# Altium PCB Project2_ESP_LoRA.PcbDoc
Units mil, origin at the board's own origin, x right, y up, seen from the top; angles counter-clockwise.
Board outline 1968.5 x 1968.5 mil, 2 copper layers (Top Layer, Bottom Layer); 28 components, 29 nets, 146 pads, 53 vias.
Unrouted connection lines stored in the file: 1.
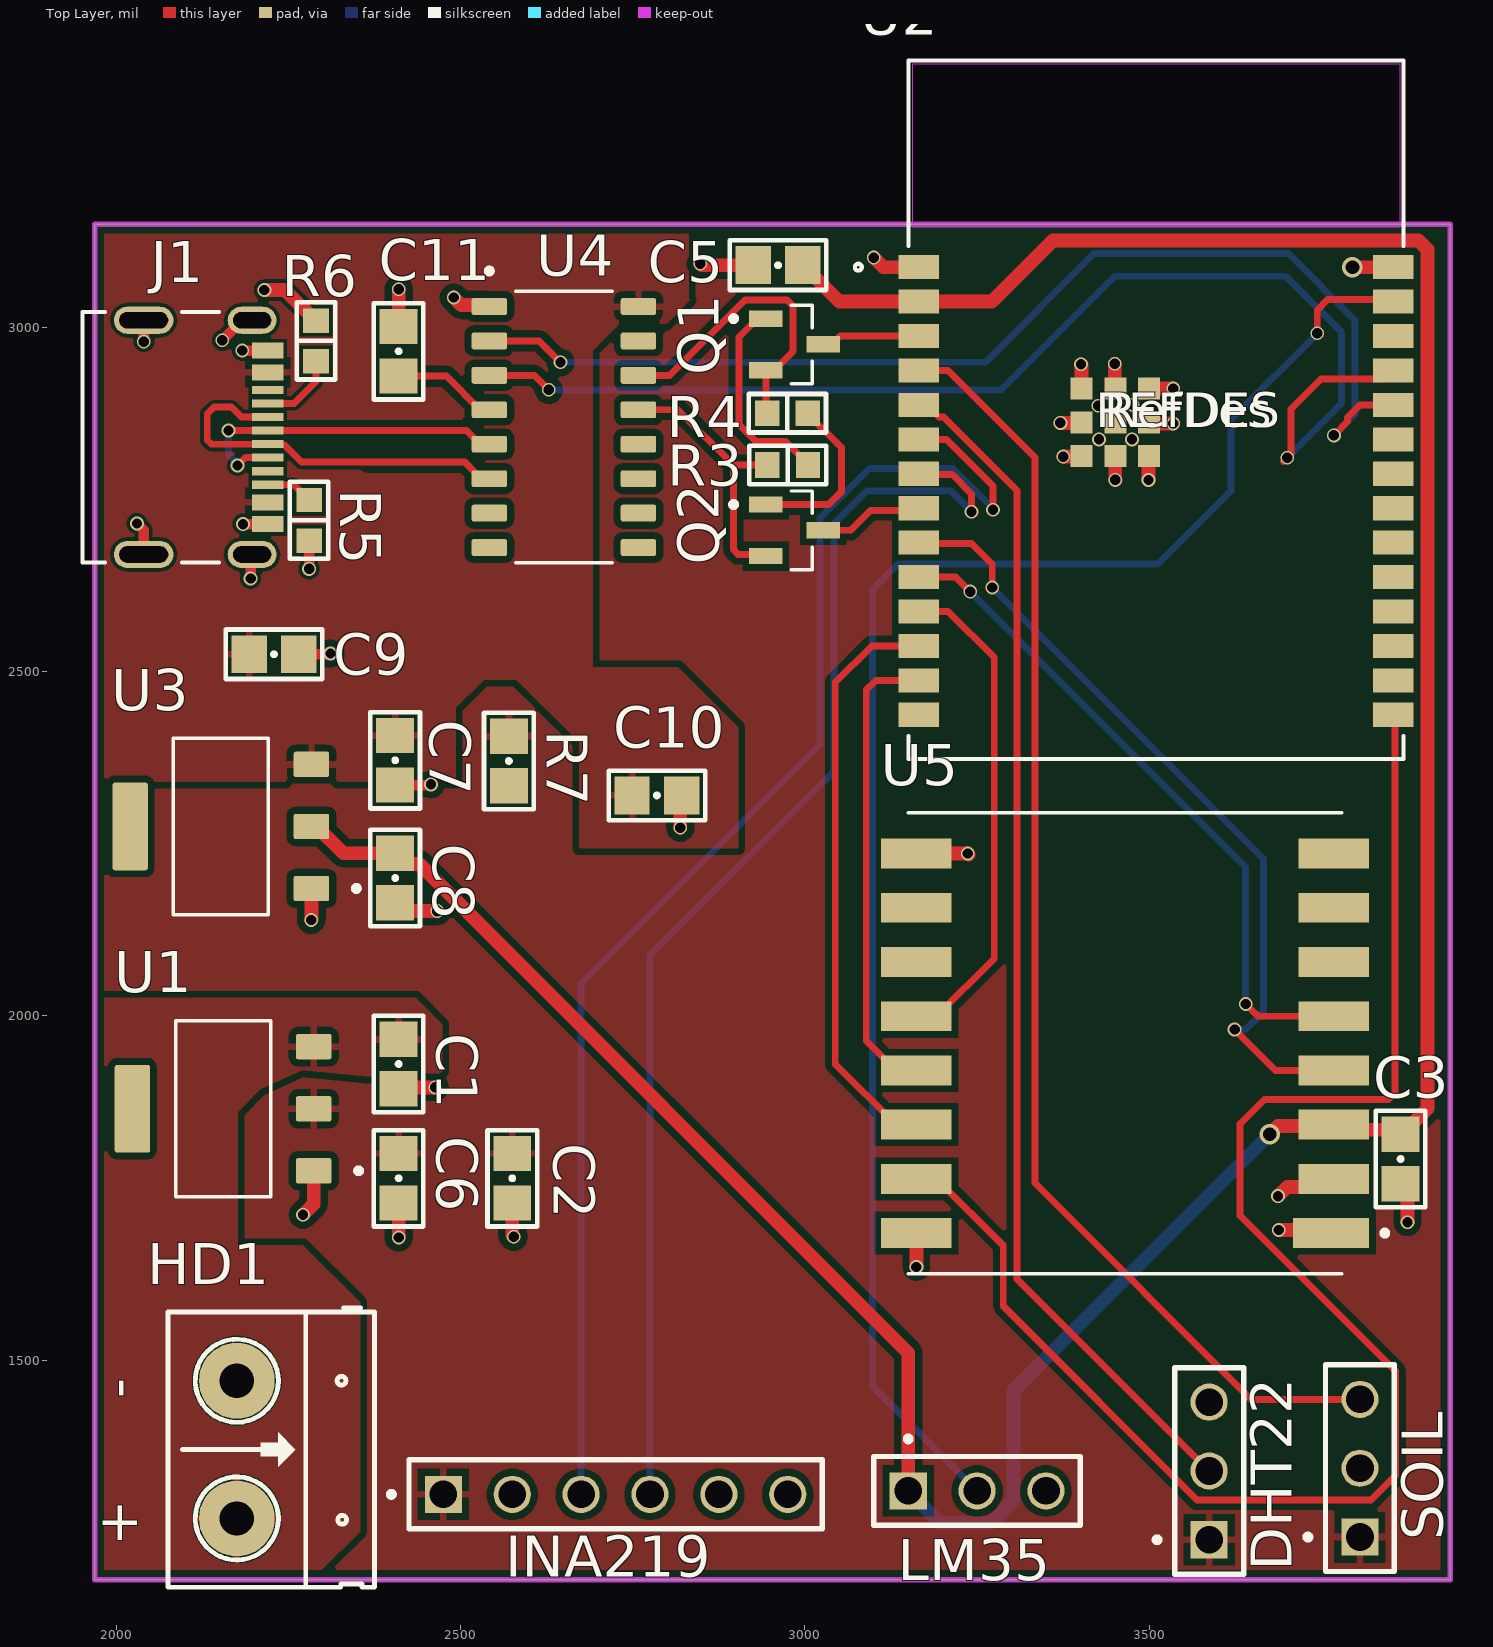
[diagram p0: Top Layer view]
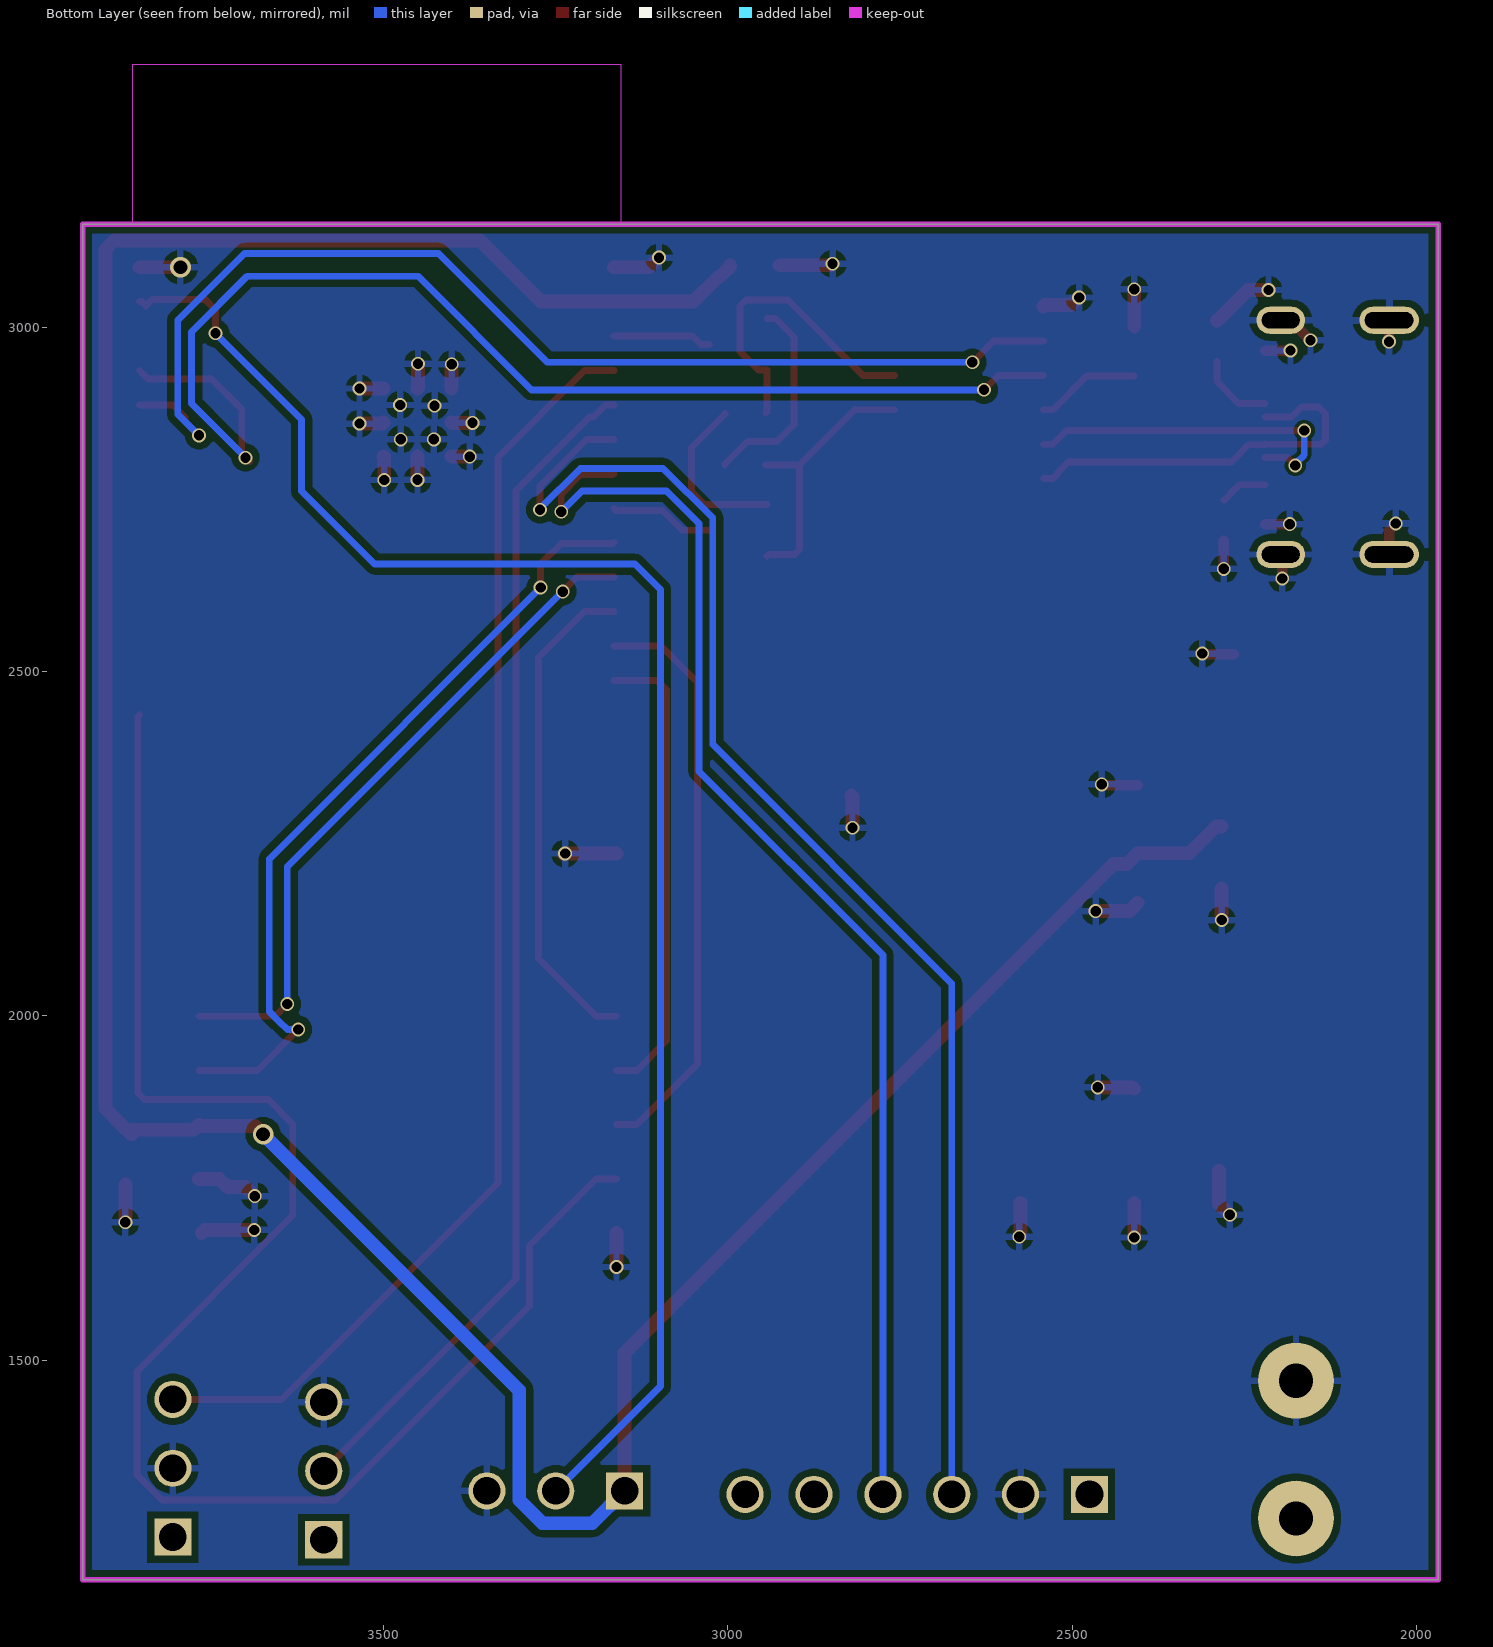
[diagram p1: Bottom Layer view, seen from below]
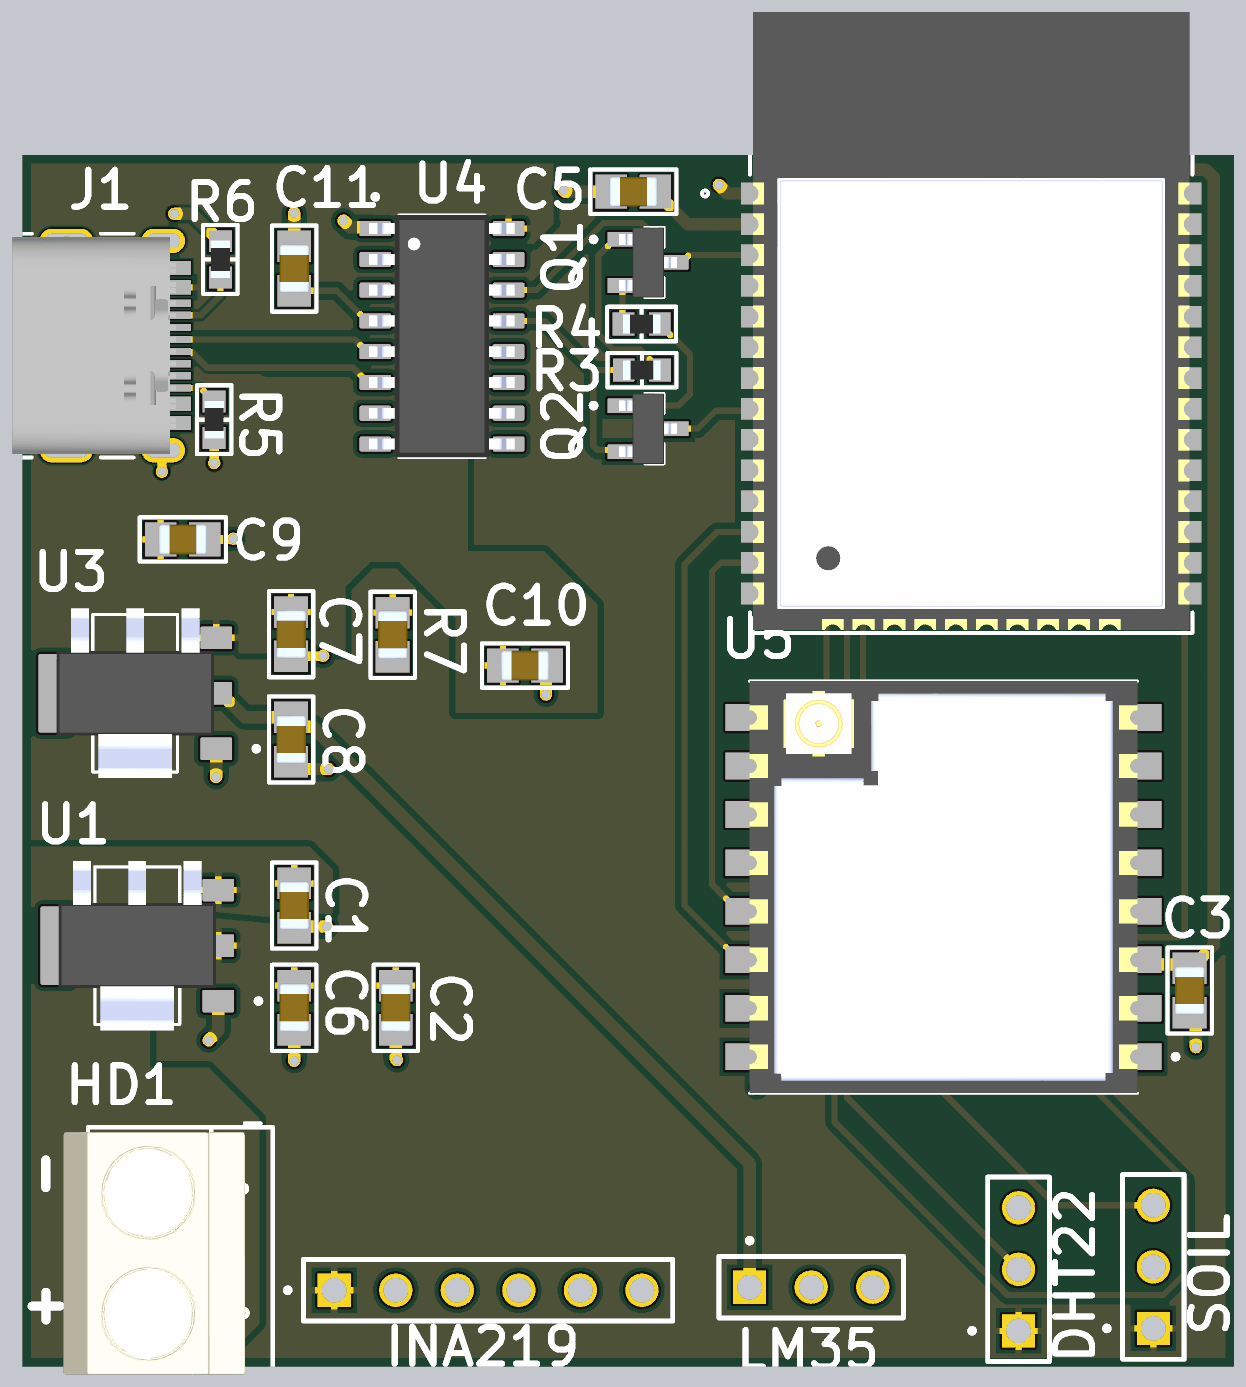
[diagram p2: 3D render of the assembled board from above, using the file's embedded part models]

## Layer stack, top to bottom
Top Solder: solder mask 0.4, Solder Resist, Dk 3.5
Top Layer: signal copper 1.4
Dielectric 1: dielectric 12.6, FR-4, Dk 4.8
Bottom Layer: signal copper 1.4
Bottom Solder: solder mask 0.4, Solder Resist, Dk 3.5

## Board outline
1968.5,1181.1 3937.01,1181.1 3937.01,3149.61 1968.5,3149.61

## Design rules (kind name [scope] priority, off if disabled: settings)
Clearance USB_clearance [WithinRoom('USB')] p1: gap=5 ignorepadtopadclearanceinfootprint=FALSE
Clearance [All] p2: gap=10 ignorepadtopadclearanceinfootprint=FALSE except(0: Arc-Hole Track-Hole SMDPad-Hole THPad-Hole Via-Hole Fill-Hole Poly-Hole Region-Hole Text-Hole)
DiffPairsRouting [All] p1: maxlimit=10 minlimit=6 mostfreqgap=10 toplayer_minwidth=10 toplayer_maxwidth=15 toplayer_prefwidth=10 bottomlayer_minwidth=10 bottomlayer_maxwidth=15 bottomlayer_prefwidth=10 maxuncoupledlength=500
PolygonConnect [All] p1: connectstyle=Relief reliefconductorwidth=10 reliefentries=4 polygonreliefangle="90 Angle" airgapwidth=10
RoomDefinition USB [False] p1: confinementstyle=ConfineIn formatcopy=TRUE lockcomponents=FALSE outline 1810.16,3109.53 2365.16,3109.53 2365.16,2599.53 1810.16,2599.53
RoutingVias [All] p1: holewidth=15 width=20 viastyle="Through Hole" minholewidth=15 minwidth=20 maxholewidth=28 maxwidth=50
SolderMaskExpansion [All] p1: expansion=4 istentingtop=FALSE
Width [InNet('Vin')] p1: maxlimit=30 minlimit=10 preferedwidth=20
Width VBUS [InNet('VBUS')] p2: maxlimit=30 minlimit=10 preferedwidth=20
Width DN [InNet('D_N')] p3: maxlimit=15 minlimit=6 preferedwidth=10
Width DP [InNet('D_P')] p4: maxlimit=10 minlimit=6 preferedwidth=10
Width GND [InNet('GND')] p5: maxlimit=30 minlimit=10 preferedwidth=20
Width 5V [InNet('+5V')] p6: maxlimit=30 minlimit=10 preferedwidth=20
Width +3V3 [InNet('+3V3')] p7: maxlimit=30 minlimit=10 preferedwidth=20
Width Signal [All] p8: maxlimit=10 minlimit=10 preferedwidth=10
29 further rules are at their usual default settings.

## Classes and differential pairs
differential pair class diff90: D
component class Sensor_Schematic: DHT22 INA219 LM35 SOIL_SENSOR
component class Programmer_Debugger: C9 C10 C11 J1 R5 R6 U4
component class LoRA_RA02: C3 U5
component class ESP32_C6_Schematic: C1 C2 C5 C6 C7 C8 HD1 Q1 Q2 R3 R4 R7 U1 U2 U3
differential pair D: +D_P -D_N

## Components (designator, comment, footprint, x,y, rotation, side; value= is the part's Value field where it differs from the comment)
C1 "0805, 25V, 10uF" C0805 2410,1930 r90 top
C2 "0805, 25V, 22uF" C0805 2575,1764 r90 top
C3 "0805, 25V, 0.1uF" C0805 3865,1792 r90 top
C5 "0805, 25V, 0.1uF" C0805 2961,3090 r0 top
C6 "0805, 25V, 10uF" C0805 2410,1764 r90 top
C7 "0805, 25V, 10uF" C0805 2405,2371 r90 top
C8 "0805, 25V, 22uF" C0805 2405,2200 r90 top
C9 "0805, 100nF, 50V" C0805 2229,2525 r180 top
C10 "0805, 100nF, 50V" C0805 2785,2320 r180 top
C11 "0805, 100nF, 50V" C0805 2410,2965 r270 top
DHT22 "3-Pin through hole" SAMTEC_MTSW-101-08-G-T-240 3587,1339 r0 top
HD1 "Header 2" HED2 2175,1470 r270 top
INA219 "6-Pin through hole" "SAMTEC_MTSW-106-22-G-S-235 - duplicate1" 2725,1305 r180 top
J1 "2171790001" MOLEX_2171790001 2085,2840 r270 top
LM35 "3-Pin through hole" SAMTEC_MTSW-101-08-G-T-240 3250,1310 r270 top
Q1 "BC816" SOT95P237X111-3N 2985,2975 r0 top
Q2 "BC816" SOT95P237X111-3N 2985,2705 r0 top
R3 "0603, 10KR" RES0603 2975,2800 r180 top
R4 "0603, 10KR" RES0603 2974.53,2875 r180 top
R5 "0603, 5K1, 10V" RES0603 2280,2719.53 r90 top
R6 "0603, 5K1, 10V" RES0603 2290,2980 r270 top
R7 "0805, 0R" C0805 2570,2370 r270 top
SOIL "3-Pin through hole" SAMTEC_MTSW-101-08-G-T-240 3806,1343 r0 top (schematic designator SOIL_SENSOR)
U1 "AMS1117-5V" SOT229P700X180-4N 2155,1865 r180 top
U2 "ESP32-C6-WROOM-1-N4" MOD28_ESP32-C6-WROOM-1_EXP 3510,2880 r0 top
U3 "AMS1117-3.3" SOT229P700X180-4N 2151.69,2275 r180 top
U4 "CH340C" SOIC127P600X180-16N 2650,2855 r0 top
U5 "RA-02_LORA" "MODULE_RA-02_LORA - duplicate" 3465,1960 r180 top

## Footprints (in the part's own frame and the unit in brackets; to place one, negate y for a bottom-side part, rotate by r counter-clockwise, add the part's x,y. Pads: shape width x height; smd on the part's side, far side on the other; paste and mask are expansions set on the pad)
C0805 [mm]
  rect 1.3x1.4 smd: 1(-0.914,0) 2(0.914,0)
  silkscreen extent -1.78,-0.91 1.78,0.91, body extent -1,-0.62 1,0.63, height 1.3
HED2 [mil] "Header 2, 2 pin, hight 300mil, Pin to Pin 200, Colour Green"
  round 110 hole 50: 1(0,0) 2(200,0)
  silkscreen extent -106,-100 300,200, body extent -92,-140 302,155, height 394
MOD28_ESP32-C6-WROOM-1_EXP [mil]
  rect 59x35 smd paste+0 mask+0: 1(-344.49,207.09) 2(-344.49,157.09) 3(-344.49,107.09) 4(-344.49,57.09) 5(-344.49,7.09) 6(-344.49,-42.91) 7(-344.49,-92.91) 8(-344.49,-142.91) 9(-344.49,-192.91) 10(-344.49,-242.91) 11(-344.49,-292.91) 12(-344.49,-342.91) 13(-344.49,-392.91) 14(-344.49,-442.91) 15(344.49,-442.91) 16(344.49,-392.91) 17(344.49,-342.91) 18(344.49,-292.91) 19(344.49,-242.91) 20(344.49,-192.91) 21(344.49,-142.91) 22(344.49,-92.91) 23(344.49,-42.91) 24(344.49,7.09) 25(344.49,57.09) 26(344.49,107.09) 27(344.49,157.09) 28(344.49,207.09)
  rect 32x32 smd paste-16 mask-16: 29(-59.25,-18.11) 30(-108.46,31.1) 31(-108.46,-18.11) 32(-108.46,-67.32) 33(-59.25,-67.32) 34(-10.04,-67.32) 35(-10.04,-18.11) 36(-10.04,31.1) 37(-59.25,31.1)
  Keep-Out Layer region: 354.5,502 -354.5,502 -354.5,266 354.5,266
  silkscreen extent -437,-507 360,507, body extent -354,-502 354,502, height 126
"MODULE_RA-02_LORA - duplicate" [mm]
  rect 2.8x1.1 smd: 1(-7.6,7)
  rect 2.6x1.1 smd: 2(-7.7,5) 3(-7.7,3) 4(-7.7,1) 5(-7.7,-1) 6(-7.7,-3) 7(-7.7,-5) 8(-7.7,-7) 9(7.7,-7) 10(7.7,-5) 11(7.7,-3) 12(7.7,-1) 13(7.7,1) 14(7.7,3) 15(7.7,5) 16(7.7,7)
  silkscreen extent -9.68,-8.5 8,8.5, body extent -8,-8.5 8,8.5, height 3.3
MOLEX_2171790001 [mm]
  rect 0.59x1.15 smd mask+0.064: A1B12(-3.2,3.425) A4B9(-2.4,3.425) B1A12(3.2,3.425) B4A9(2.4,3.425)
  rect 0.298x1.15 smd mask+0.064: A5(-1.25,3.425) A6(-0.25,3.425) A7(0.25,3.425) A8(1.25,3.425) B5(1.75,3.425) B6(0.75,3.425) B7(-0.75,3.425) B8(-1.75,3.425)
  oval 1x1.8 hole 0.6 slot 1.4 at 90 deg mask+0.064: SH1(-4.32,2.85) SH2(4.32,2.85)
  oval 1x2.2 hole 0.6 slot 1.8 at 90 deg mask+0.064: SH3(4.32,-1.15) SH4(-4.32,-1.15)
  silkscreen extent -4.62,-3.4 4.62,1.63, body extent -4.47,-3.38 4.47,3.38, height 3.2
RES0603 [mm]
  rect 0.9x0.95 smd: 1(-0.75,0) 2(0.75,0)
  silkscreen extent -1.42,-0.71 1.42,0.71, body extent -0.77,-0.4 0.77,0.4, height 0.6
SAMTEC_MTSW-101-08-G-T-240 [mm]
  rect 1.37x1.37 / inner round 1.37 / far side rect 1.37x1.37 hole 1.02: 01(0,-2.54)
  round 1.37 hole 1.02: 02(0,0) 03(0,2.54)
  silkscreen extent -2.02,-3.81 1.27,3.81
"SAMTEC_MTSW-106-22-G-S-235 - duplicate1" [mm]
  rect 1.37x1.37 / inner round 1.37 / far side rect 1.37x1.37 hole 1.02: 01(6.35,0)
  round 1.37 hole 1.02: 02(3.81,0) 03(1.27,0) 04(-1.27,0) 05(-3.81,0) 06(-6.35,0)
  silkscreen extent -7.62,-1.27 8.37,1.27
SOIC127P600X180-16N [mm]
  rrect25% 1.31x0.62 smd: 1(-2.75,4.445) 2(-2.75,3.175) 3(-2.75,1.905) 4(-2.75,0.635) 5(-2.75,-0.635) 6(-2.75,-1.905) 7(-2.75,-3.175) 8(-2.75,-4.445) 9(2.75,-4.445) 10(2.75,-3.175) 11(2.75,-1.905) 12(2.75,-0.635) 13(2.75,0.635) 14(2.75,1.905) 15(2.75,3.175) 16(2.75,4.445)
  silkscreen extent -2.85,-5 1.78,5.85, body extent -3,-5 3,5, height 1.8
SOT95P237X111-3N [mm]
  rect 1.23x0.6 smd: 1(-1.06,0.95) 2(-1.06,-0.95) 3(1.06,0)
  silkscreen extent -2.35,-1.45 0.65,1.45, body extent -1.2,-1.45 1.2,1.45, height 1.11
SOT229P700X180-4N [mm]
  rrect15% 1.31x0.93 smd: 1(-3.345,2.29) 2(-3.345,0) 3(-3.345,-2.29)
  rrect15% 1.31x3.24 smd: 4(3.345,0)
  silkscreen extent -5.1,-3.25 1.75,3.25, body extent -3.25,-3.5 3.25,3.5, height 1.8

## Part data
C1 C2 C3 C5 C6 C7 C8 C9 C10 C11: library part C0805, "C0805"
DHT22 INA219 LM35 SOIL: Package=None, Availability=Unavailable, Price=None
  DHT22 LM35 SOIL: MP=altium_native_batch
  INA219: MP=MTSW-106-22-G-S-235
HD1: library part Hed2, "Header 2 (Green)"
J1: "USB Type C - Connector, Top-mount SMT, 16pos", Package=None, Check_prices=https://www.snapeda.com/parts/217179-0001/Molex/view-part/?ref=eda, MF=Molex, MP=217179-0001, SnapEDA_Link=https://www.snapeda.com/parts/217179-0001/Molex/view-part/?ref=snap
Q1 Q2: "Transistor NPN 45V 0.5A hfe160 SOT23", Package="SOT-23-3 ON Semiconductor", Check_prices=https://www.snapeda.com/parts/BC817-25LT1G/Onsemi/view-part/?ref=eda, MF="ON Semiconductor", MP=BC817-25LT1G, SnapEDA_Link=https://www.snapeda.com/parts/BC817-25LT1G/Onsemi/view-part/?ref=snap
R3 R4 R5 R6: library part R0603, "R0603"
R7: library part R0805, "R0805"
U1: "Sot223/Pkg 1-Amp 5V-Volt Low Drop Out Voltage Regulatator", Package="SOT-223 Seeed Technology", Check_prices=https://www.snapeda.com/parts/AMS1117-3.3/Advanced+Monolithic+Systems/view-part/?ref=eda, MF="Advanced Monolithic Systems", MP=AMS1117-3.3, SnapEDA_Link=https://www.snapeda.com/parts/AMS1117-3.3/Advanced+Monolithic+Systems/view-part/?ref=snap
U2: "Description", Manufacturer_Name="Espressif Systems", Copyright="Copyright (C) 2025 Ultra Librarian. All rights reserved.", Manufacturer_Part_Number=ESP32-C6-WROOM-1-N4, RefDes=RefDes, Type=RF
U3: "Sot223/Pkg 1-Amp 3.3-Volt Low Drop Out Voltage Regulatator", Package="SOT-223 Seeed Technology", Check_prices=https://www.snapeda.com/parts/AMS1117-3.3/Advanced+Monolithic+Systems/view-part/?ref=eda, MF="Advanced Monolithic Systems", MP=AMS1117-3.3, SnapEDA_Link=https://www.snapeda.com/parts/AMS1117-3.3/Advanced+Monolithic+Systems/view-part/?ref=snap
U4: "USB to serial chip CH340", Package=None, Availability="Not in stock", Check_prices=https://www.snapeda.com/parts/CH340C/WCH/view-part/?ref=eda, MF=WCH, MP=CH340C, Price=None, SnapEDA_Link=https://www.snapeda.com/parts/CH340C/WCH/view-part/?ref=snap
U5: "Ra-02 LoRa RF M5Stack Platform Evaluation Expansion Board", Package=None, Availability=Unavailable, MP=RA-02_LORA, Price=None

## Via types
v1: diameter 20, hole 15, Top Layer to Bottom Layer, 50 vias
v2: diameter 30, hole 20, Top Layer to Bottom Layer, 2 vias
v3: diameter 20/20 (per signal layer), hole 15, Top Layer to Bottom Layer, 1 vias

## Nets (pads, with @x,y where several pads share a name; then routed paths per layer and width w, separated by ;. In a path a pad name is that pad's centre, name@x,y a point inside that pad or via, vN(x,y) a via of type N, cw(c..) or ccw(c..) an arc to the next point about the centre after c; other vN are vias at no path point)
+3V3: C3.2 C5.2 C8.2 LM35.01 U2.2 U3.2 U5.3 | length 4738.7
  Top Layer w20: U3.2 2290.87,2275 2329.87,2236 C8.2 2420.59,2220.41 2440.02,2220.41 3150,1510.43 LM35.01 ; C5.2 2997,3088.03 3012.59,3072.44 3014.56,3072.44 3049.91,3037.09 U2.2 3271.42,3037.09 3360,3125.67 3891.19,3125.67 3903.99,3112.87 3903.99,1865.02 3882.56,1843.59 3866.97,1828 C3.2 3865,1831.89 3867.56,1834.44 3775.59,1834.44 U5.3 3766.23,1839.97 3686.97,1839.97 v2(3675,1828)
  Bottom Layer w20: LM35.01 3196.97,1263.03 3269.45,1263.03 3303.03,1296.61 3303.03,1456.03 v2(3675,1828)
+5V: C2.2 C6.2 DHT22.01 INA219.01 R7.1 SOIL.01 U1.2
D_N: J1.A7 J1.B7 U4.6 | length 570.1
  Top Layer w10: J1.B7 2181.47,2869.53 2167,2884 2142,2884 2132,2874 2132,2836 2138,2830 2219.68,2830 J1.A7 2220.71,2829.29 2243.67,2829.29 2268.96,2804 2365.16,2804 2506,2804 2520.94,2789.06 2520.94,2787.2 2528.15,2780 U4.6
D_P: J1.A6 J1.B6 U4.5 | length 492
  Top Layer w10: v1(2163,2850) 2163.16,2849.84 J1.A6 2508.31,2849.84 2528.15,2830 U4.5 ; v1(2176,2799) 2187.47,2810.47 J1.B6
  Bottom Layer w10: v1(2163,2850) 2163,2814.71 2176,2801.71 v1(2176,2799)
EN: Q1.3 U2.3 | length 143.8
  Top Layer w10: Q1.3 3039.13,2975 3051.22,2987.09 U2.3
GND: C1.1 C2.1 C3.1 C5.1 C6.1 C7.1 C8.1 C9.1 C10.1 C11.1 DHT22.03 HD1.1 INA219.02 J1.A1B12 J1.B1A12 J1.SH1 J1.SH2 J1.SH3 J1.SH4 LM35.03 R5.1 R6.1 SOIL.02 U1.1 U2.1 U2.28 U2.29 U2.30 U2.31 U2.32 U2.33 U2.34 U2.35 U2.36 U2.37 U3.1 U4.1 U5.1 U5.2 U5.9 U5.16 | length 1801.6
  Top Layer w15: v1(2030,2715) 2039.72,2705.28 J1.SH3 ; J1.SH4 2040,3009.8 v1(2040,2979) ; v1(2154,2981) 2183.08,3010.08 J1.SH1 ; v1(2183,2966) J1.A1B12 ; v1(2184,2714) J1.B1A12 ; v1(2195,2635) 2195,2667.72 J1.SH2 ; C9.1 2310,2525 v1(2311,2526) ; v1(2280,2649) R5.1 ; C7.1 2456,2335 v1(2457,2336)
  Top Layer w20: v1(2215,3054) 2244.54,3054 2289.02,3009.53 R6.1 ; v1(2271,1711) 2286.69,1726.69 U1.1 ; v1(2283,2139) 2283.39,2139.39 U3.1 ; C8.1 2417,2152 v1(2466,2152) ; v1(2410,1678) C6.1 ; C1.1 2412,1896 v1(2463,1896) ; C11.1 v1(2410,3055) ; v1(2490,3043) 2500.8,3032.2 2539.53,3032.2 U4.1 ; C2.1 2575,1681 v1(2577,1679) ; v1(2819,2273) 2819,2318 C10.1 ; v1(2848,3092) 2850,3090 C5.1 ; v1(3100,3101) 3113.91,3087.09 U2.1 ; U5.16 v1(3161.85,1635.15) v1@3162,1635 ; U5.9 v1(3236.41,2235.59) v1@3238,2234 ; v1(3371,2861) 3400.65,2861 U2.31 ; v1(3375,2812) 3400.86,2812 U2.32 ; v3(3401,2946) 3401.54,2945.46 U2.30 ; v1(3450,2947) 3450,2911.85 U2.37 ; U2.33 v1(3450.75,2778.25) v1@3451,2778 ; v1(3499,2778) 3499,2811.72 U2.34 ; U2.35 3501.85,2860 v1(3535,2860) ; U2.36 3534.9,2911.1 v1(3535,2911) ; v1(3687,1738.15) 3700.35,1751.5 3726.97,1751.5 3738.62,1763.15 U5.2 ; v1(3688,1689) 3759.62,1689 U5.1 ; v2(3795.04,3087.04) 3795.09,3087.09 U2.28 ; v1(3875,1700) C3.1@3875,1755
  other v1: 3427,2837 3475,2837 3426,2886 3476,2887
IO0: Q2.3 U2.8 | length 152.1
  Top Layer w10: Q2.3 3066,2705 3095,2734 3162.43,2734 U2.8
NetC11_2: C11.2 U4.4 | length 152
  Top Layer w10: C11.2 2479.15,2929 2528.15,2880 U4.4
NetDHT22_02: DHT22.02 U2.5 | length 1733.3
  Top Layer w10: U2.5 3177.51,2887.09 3195.01,2869.59 3201.22,2869.59 3308,2762.81 3308,1618 DHT22.02
NetINA219_03: INA219.03 U2.6 | length 2038.2
  Top Layer w10: U2.6 3205.44,2837.09 3273,2769.53 v1(3273,2735)
  Bottom Layer w10: INA219.03 2675,2047 3022,2394 3022,2723 3094,2795 3214.36,2795 3273,2736.36 v1(3273,2735)
NetINA219_04: INA219.04 U2.7 | length 1866.9
  Top Layer w10: U2.7 3166.6,2786 3214,2786 3242,2758 v1(3242,2732)
  Bottom Layer w10: INA219.04 2775,2088 3042,2355 3042,2714.72 3089.28,2762 3212,2762 v1(3242,2732)
NetJ1_A5: J1.A5 R6.2 | length 112.8
  Top Layer w10: J1.A5 2258.21,2889.21 2290,2921 R6.2
NetJ1_B5: J1.B5 R5.2 | length 69.9
  Top Layer w10: J1.B5 2257.95,2771.1 2268.8,2760.26 2268.8,2759.27 2279.02,2749.06 R5.2
NetLM35_02: LM35.02 U2.27 | length 2389.9
  Top Layer w10: v1(3744,2991) 3744,3025 3759,3040 3836,3040 3845,3031 3851.09,3037.09 U2.27
  Bottom Layer w10: LM35.02 3098,1462 3098,2619 3135,2656 3513,2656 3619,2762 3619,2866 v1(3744,2991)
NetQ1_1: Q1.1 R3.1 | length 302.8
  Top Layer w10: Q1.1 2930.87,3012.4 2904,2985.54 2904,2858.37 2928.67,2833.7 2971.81,2833.7 3004.53,2800.98 R3.1
NetQ1_2: Q1.2 R4.2 U4.14 | length 452.7
  Top Layer w10: U4.14 2803.63,2930 2912.84,3039.21 2973.69,3039.21 2982.48,3030.43 2982.48,2964.41 2955.67,2937.6 Q1.2 2943.27,2876.73 R4.2
NetQ2_1: Q2.1 R4.1 | length 251.7
  Top Layer w10: Q2.1 3034.4,2742.4 3053,2761 3053,2825.07 3004.06,2874.02 R4.1
NetQ2_2: Q2.2 R3.2 U4.13 | length 394.5
  Top Layer w10: U4.13 2816,2880 2896,2800 ; Q2.2 2940.87,2670 2903,2670 2896,2677 2896,2800 ; R3.2 2896,2800
NetSOIL_SENSOR_03: SOIL.03 U2.4 | length 1876.8
  Top Layer w10: U2.4 3207.91,2937.09 3334,2811 3334,1757 3648,1443 SOIL.03
NetU2_9: U2.9 U5.4 | length 1154.2
  Top Layer w10: U2.9 3166.6,2686 3242,2686 3272,2656 v1(3272,2622) ; v1(3624,1980) 3683.37,1920.63 U5.4
  Bottom Layer w10: v1(3272,2622) 3666,2228 3666,2005.86 3652.14,1992 3651.6,1992 3639.6,1980 v1(3624,1980)
NetU2_10: U2.10 U5.5 | length 970.6
  Top Layer w10: U2.10 3218.91,2637.09 v1(3240,2616) ; 3649,2008 3657.63,1999.37 U5.5
  Bottom Layer w10: v1(3240,2616) 3640,2216 v1(3640,2017)
NetU2_11: U2.11 U5.12 | length 722.1
  Top Layer w10: U5.12 3191.38,1999.37 3275,2082.99 3275,2520 3207.91,2587.09 U2.11
NetU2_12: U2.12 U5.14 | length 851.7
  Top Layer w10: U5.14 3132.32,1841.89 3044,1930.21 3044,2484 3097.09,2537.09 U2.12
NetU2_13: U2.13 U5.13 | length 682.2
  Top Layer w10: U5.13 3132.32,1920.63 3089,1963.95 3089,2473 3103.09,2487.09 U2.13
NetU2_15: U2.15 U5.15 | length 2353.1
  Top Layer w10: U5.15 3191.38,1763.15 3288,1666.53 3288,1578.65 3569.62,1297.03 3822.03,1297.03 3858,1333 3858,1483.64 3632,1709.64 3632,1843.14 3667.4,1878.54 3847.54,1878.54 3857,1888 3857,2434.57 U2.15
NetU2_24: U2.24 U4.2 | length 1664
  Top Layer w10: U4.2 2614,2980 v1(2645,2949) ; v1(3768.18,2842.82) 3788.09,2862.73 3788.09,2869.09 3806.09,2887.09 U2.24
  Bottom Layer w10: v1(2645,2949) 3262,2949 3420,3107 3702,3107 3799,3010 3799,2873.64 v1(3768.18,2842.82)
NetU2_25: U2.25 U4.3 | length 1820.8
  Top Layer w10: U4.3 2607,2930 v1(2628,2909) ; v1@3695,2805 v1(3700.5,2810.5) 3706,2816 3706,2881 3749.59,2924.59 3841.99,2924.59 U2.25
  Bottom Layer w10: v1(2628,2909) 2628,2913 2632,2909 3285,2909 3450,3074 3698,3074 3779,2993 3779,2889 3740,2850 v1(3700.5,2810.5)
VBUS: C7.2 C9.2 C10.2 J1.A4B9 J1.B4A9 R7.2 U3.3 U4.16
Vin: C1.2 HD1.2 U1.3
pads on no net: INA219.05 INA219.06 J1.A8 J1.B8 U1.4 U2.14 U2.16 U2.17 U2.18 U2.19 U2.20 U2.21 U2.22 U2.23 U2.26 U3.4 U4.7 U4.8 U4.9 U4.10 U4.11 U4.12 U4.15 U5.6 U5.7 U5.8 U5.10 U5.11

## Polygon pours and split planes (outlines as drawn)
GND on Bottom Layer "GND" (solid, remove dead copper, pour order 0): 1968.5,3149.61 3937.01,3149.61 3937.01,1181.1 3161,1181.1 1968.5,1181.1 1955.56,1165.3
+5V on Top Layer "VBUS" (solid, remove dead copper, pour order 6): 3937.01,1181.1 1968.5,1181.1 1968.5,3149.61 3937.01,3149.61 3937.01,2915
VBUS on Top Layer "VBUS" (solid, remove dead copper, pour order 5): 2731,3005 2799,3005 2833,3039 2831,3041 2831,3144 1971,3144 1967,3140 1967,2340 2493,2340 2493,2447 2534,2488 2581,2488 2672,2397 2672,2332 2672,2243 2903,2243 2903,2419 2816,2506 2692,2506 2692,2966
Vin on Top Layer "GND" (solid, remove dead copper, pour order 4): 2269.71,1920.87 2369,1911.46 2473,1911.46 2473,1988 2435,2026 1969,2026 1969,1600 1969,1185 2288,1185 2354,1251 2354,1584 2271,1667 2176,1667 2176,1860 2209,1893

## Keep-outs
Keep-Out Layer:
  the board outline again, w7.87

## Silkscreen, mask and mechanical layers (free items; w line width, h text height)
Top Overlay:
  text "-" at 2029.83,1444.68 h59.06 r90
  text "+" at 2030.15,1229.68 h59.06 r90

## Text inside footprints (layer, text, board x,y; h text height)
U2: Top Overlay "REFDES" at 3422.5,2855 h50; Top Overlay "RefDes" at 3435,2855 h50; Mechanical 13 "RefDes2" at 3422.5,2855 h50